# Altium PCB Mosfet_Driver_Circuit.PcbDoc
Units mm, origin at the board's own origin, x right, y up, seen from the top; angles counter-clockwise.
Board outline 99.57 x 123 mm, 2 copper layers (Top Layer, Bottom Layer); 77 components, 37 nets, 241 pads, 61 vias.
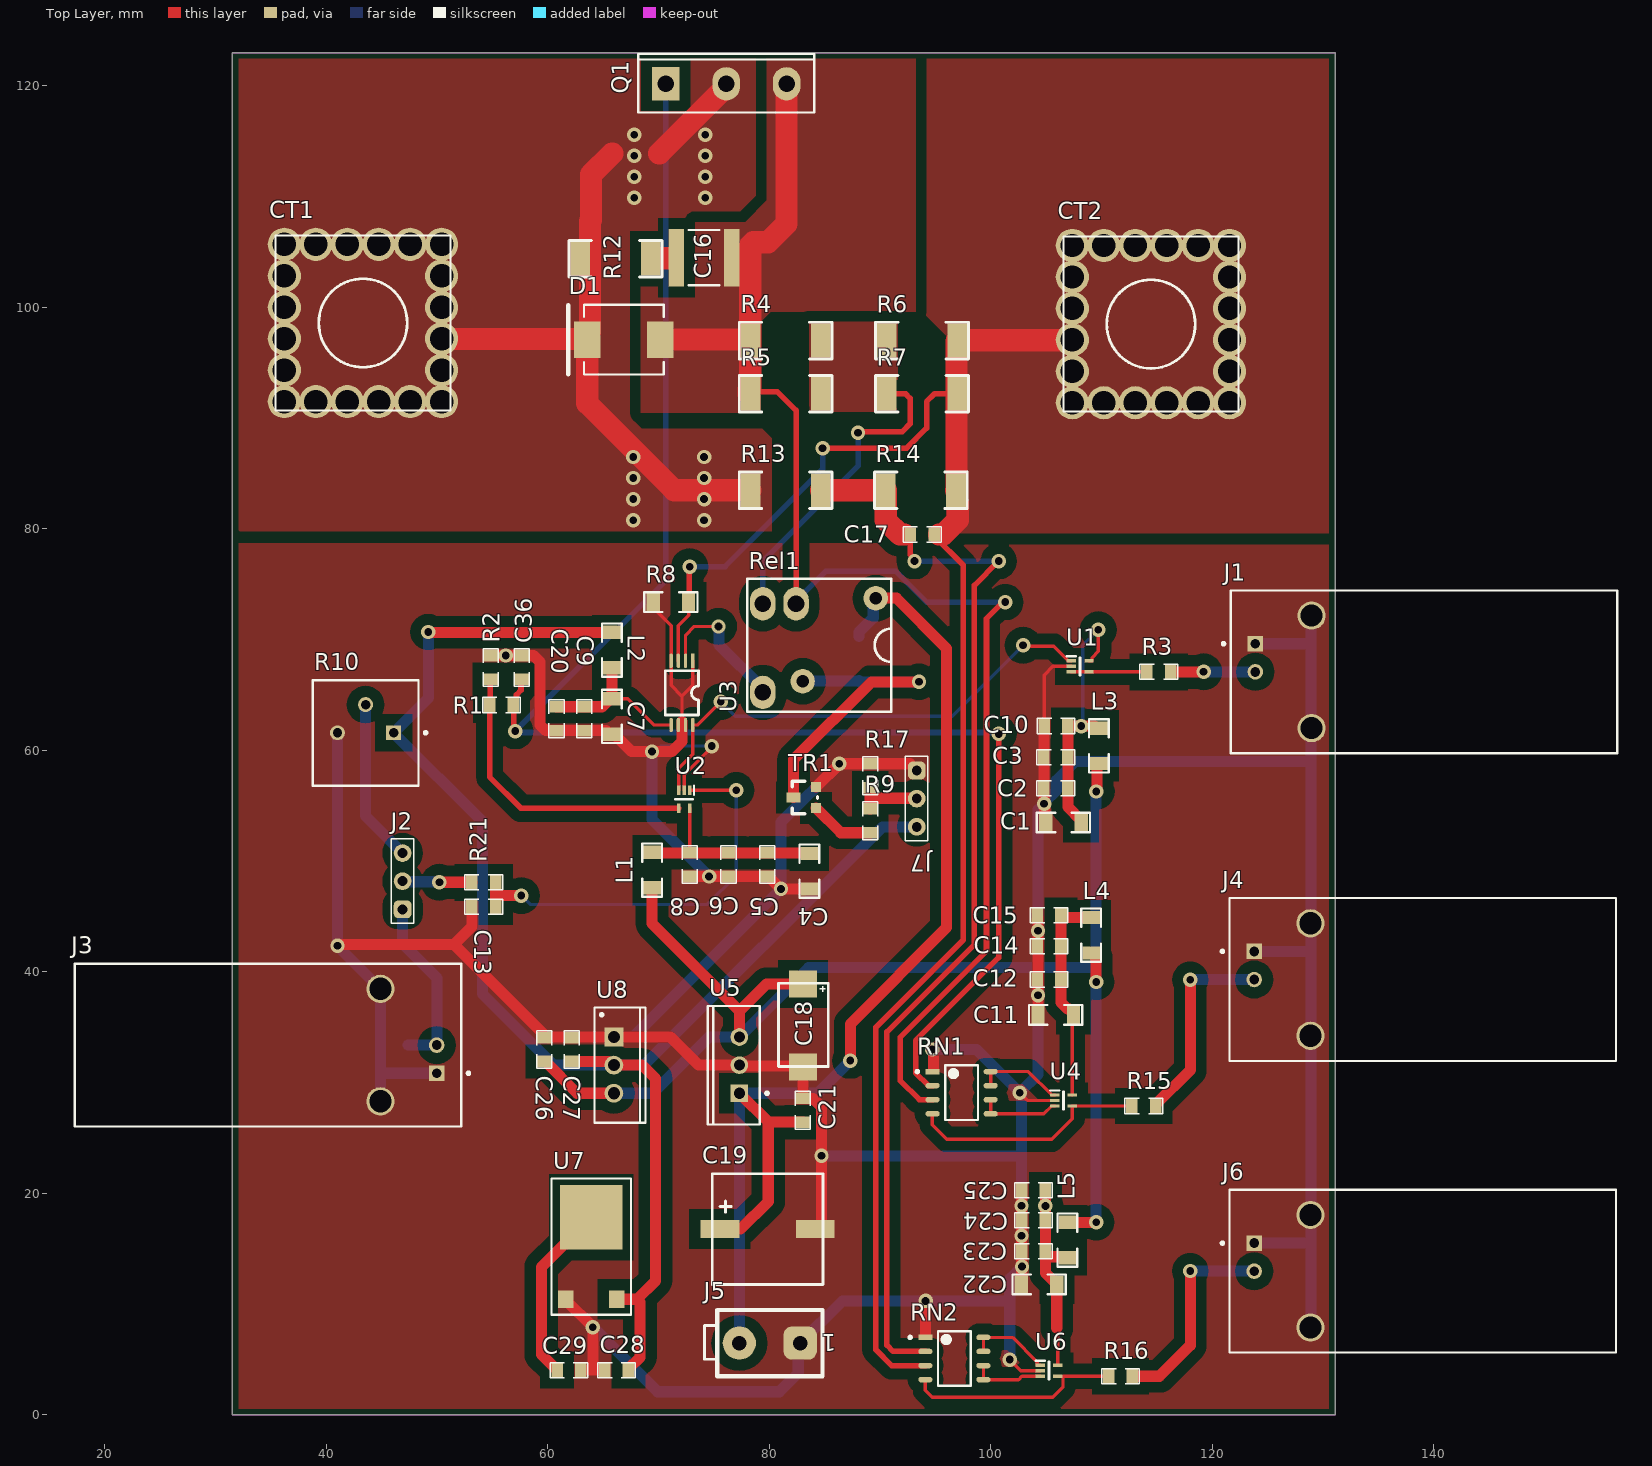
[diagram p0: Top Layer view]
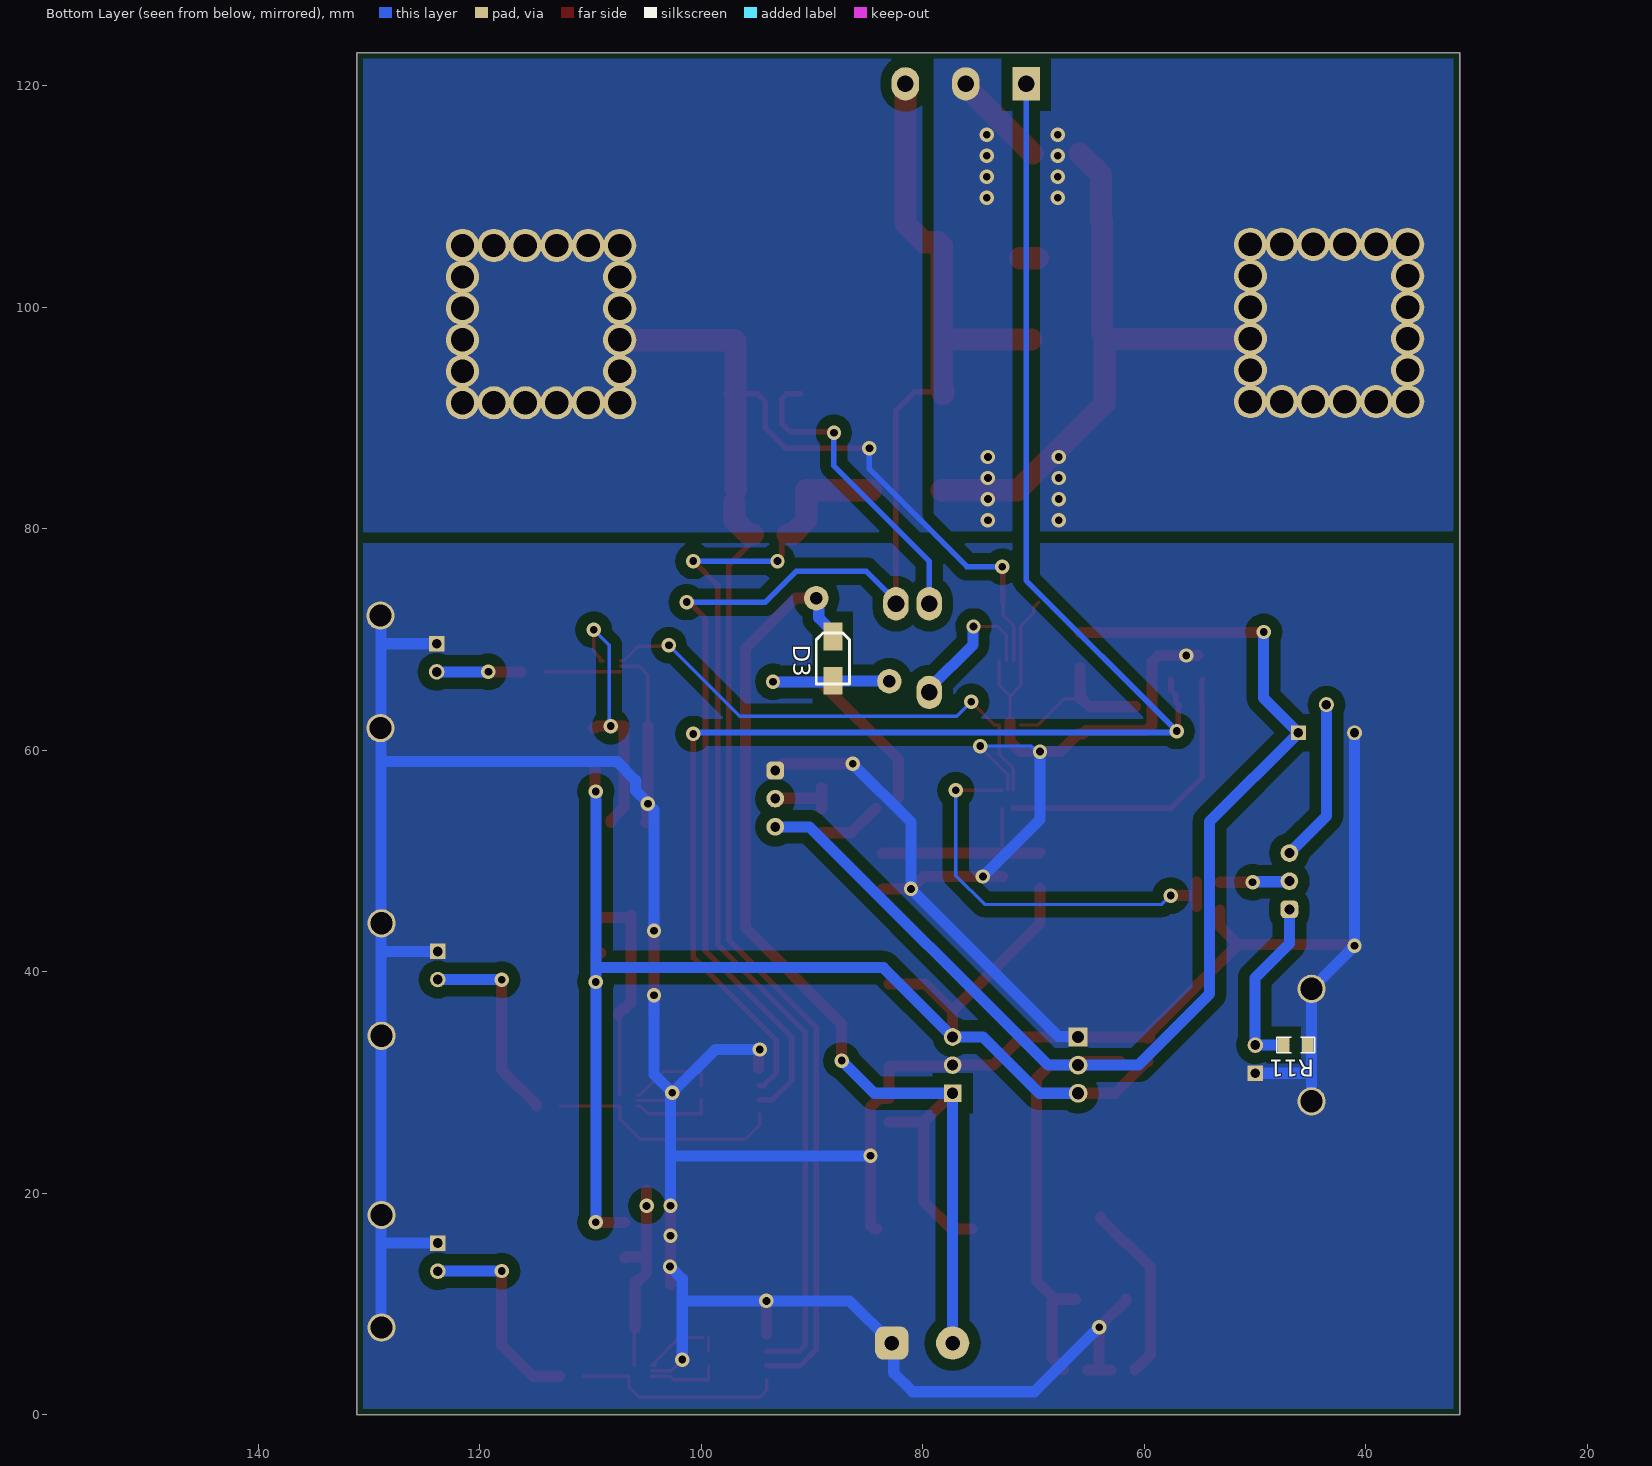
[diagram p1: Bottom Layer view, seen from below]
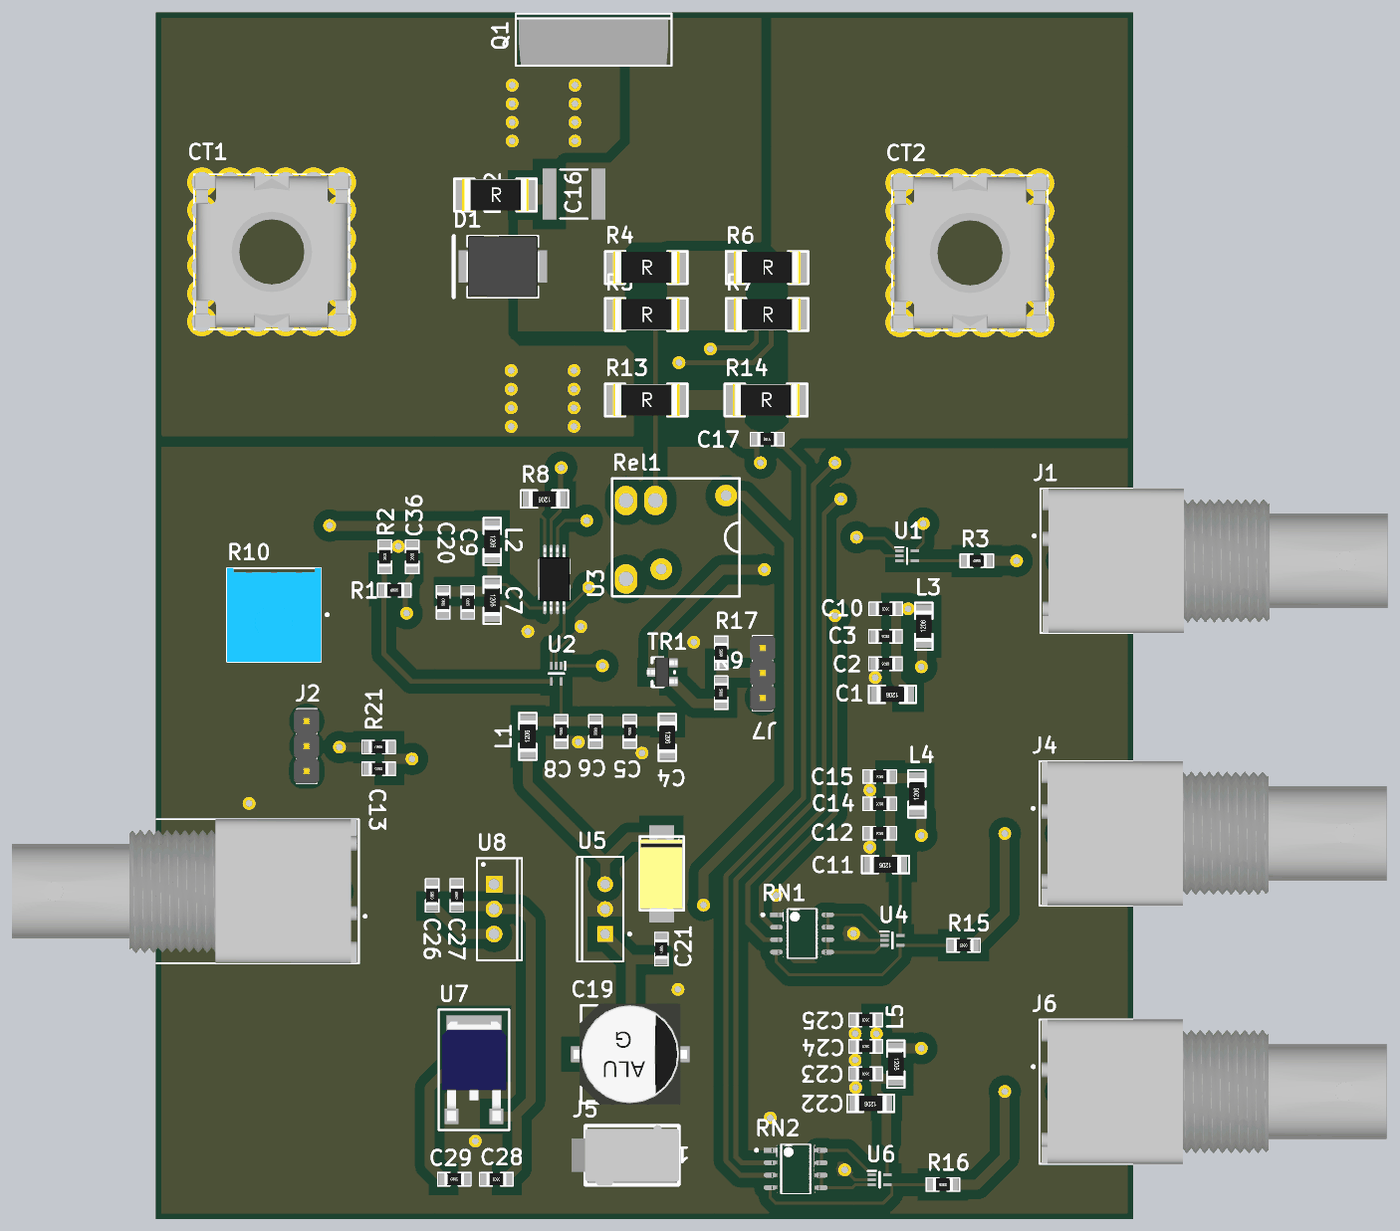
[diagram p2: 3D render of the assembled board from above, using the file's embedded part models]

## Layer stack, top to bottom
Top Solder: solder mask 0.0102, Solder Resist, Dk 3.5
Top Layer: signal copper 0.0356
Dielectric 1: dielectric 0.32, FR-4, Dk 4.8
Bottom Layer: signal copper 0.0356
Bottom Solder: solder mask 0.0102, Solder Resist, Dk 3.5

## Board outline
31.5,0 31.5,123 131.074,123 131.074,0

## Design rules (kind name [scope] priority, off if disabled: settings)
Clearance Keep-Poly [(OnLayer('Keep-Out Layer')) vs (InPoly)] p1: gap=0.5 ignorepadtopadclearanceinfootprint=FALSE
Clearance Polygon [All vs (InPoly)] p2: gap=1 ignorepadtopadclearanceinfootprint=FALSE
Clearance Keepout [All vs (OnLayer('Keep-Out Layer'))] p3: gap=0.5 ignorepadtopadclearanceinfootprint=FALSE
Clearance [All] p4: gap=0.2 ignorepadtopadclearanceinfootprint=FALSE
ComponentClearance [All] p1: gap=0.1 collisioncheckmode=3 verticalgap=0.2 showdistances=FALSE
FabricationTestPointUsage TestPointUsage [All] p1: valid=0 allowmultiple=FALSE
FabricationTestpoint Testpoint [All] p1: side=3 testpointundercomponent=TRUE minsize=1.016 maxsize=2.54 preferedsize=1.524 minholesize=0 maxholesize=1.016 preferedholesize=0.813 testpointgrid=0.025 allowsidetop=TRUE allowsidebottom=TRUE usegrid=TRUE gridtolerance=0
HoleSize [All] p1: absolutevalues=TRUE maxlimit=3.5 minlimit=0 maxpercent=80.000 minpercent=20.000
PlaneClearance [All] p1: clearance=1
PlaneConnect [All] p1: planeconnectstyle=Direct reliefexpansion=0.508 reliefentries=4 reliefconductorwidth=0.254 reliefairgap=0.254
PolygonConnect PolygonConnect_1 [InNet('BAT+')] p1: connectstyle=Direct reliefconductorwidth=0.254 reliefentries=4 polygonreliefangle="90 Angle" airgapwidth=0.254
PolygonConnect [All] p2: connectstyle=Direct reliefconductorwidth=0.8 reliefentries=4 polygonreliefangle="90 Angle" airgapwidth=0.254
RoutingVias [All] p1: holewidth=0.3 width=0.6 viastyle="Through Hole" minholewidth=0.3 minwidth=0.6 maxholewidth=0.8 maxwidth=1.3
SolderMaskExpansion [(IsVia)] p1: expansion=-10 istentingtop=FALSE
Width SGND [InNet('SGND')] p1: maxlimit=2 minlimit=0.3 preferedwidth=0.5 minimp=50.000000 maximp=50.000000 favimp=50.000000
Width PGND [InNet('PGND')] p2: maxlimit=3 minlimit=0.5 preferedwidth=0.5 minimp=50.000000 maximp=50.000000 favimp=50.000000
Width [All] p3: maxlimit=2 minlimit=0.2 preferedwidth=0.2 minimp=50.000000 maximp=50.000000 favimp=50.000000
24 further rules are at their usual default settings.

## Components (designator, comment, footprint, x,y, rotation, side; value= is the part's Value field where it differs from the comment)
C1 "10uF X7R 50V" 1206 106.55,53.5 r180 top
C2 "100nF X7R 100V" 0805 105.85,56.6 r180 top
C3 "1nF X7R 50V" 0805 105.85,59.4 r180 top
C4 "10uF X7R 50V" 1206 83.6,49.1 r270 top
C5 "100nF X7R 100V" 0805 79.798,49.695 r270 top
C6 "1nF X7R 50V" 0805 76.298,49.695 r270 top
C7 "10uF X7R 50V" 1206 65.775,63.073 r270 top
C8 "10pF C0G" 0805 72.798,49.695 r270 top
C9 "100nF X7R 100V" 0805 63.275,62.873 r270 top
C10 "10pF C0G" 0805 105.875,62.204 r180 top
C11 "10uF X7R 50V" 1206 105.85,36.12 r180 top
C12 "100nF X7R 100V" 0805 105.25,39.32 r180 top
C13 "100nF X7R 50V" 0805 54.2,45.9 r0 top
C14 "1nF X7R 50V" 0805 105.25,42.32 r180 top
C15 "10pF C0G" 0805 105.25,45.12 r180 top
C16 "3.3uF X7R 250V" 2220 74.1,104.5 r0 top
C17 "100nF X7R 100V" 0805 93.8,79.5 r0 top
C18 "22uF 25V" TANT_D 83.02,35.17 r90 top
C19 "220uF 50V" C_G55 79.83,16.791 r180 top
C20 "10pF C0G" 0805 60.775,62.873 r270 top
C21 "1uF X7R 25V" 0805 83.02,27.511 r90 top
C22 "10uF X7R 50V" 1206 104.345,11.791 r180 top
C23 "100nF X7R 100V" 0805 103.845,14.791 r180 top
C24 "1nF X7R 50V" 0805 103.845,17.591 r180 top
C25 "10pF C0G" 0805 103.845,20.291 r180 top
C26 "100nF X7R 50V" 0805 59.657,32.99 r90 top
C27 "10uF X5R 10V" 0805 62.157,32.99 r90 top
C28 "100nF X7R 50V" 0805 66.2,4.052 r180 top
C29 "10uF X5R 10V" 0805 61.9,4.052 r0 top
C36 "NM-1nF X7R 50V" 0805 57.629,67.5 r90 top
CT1 "POWERPLUS F-M8" "PowerPlus M8" 43.3,98.6 r0 top
CT2 "POWERPLUS F-M8" "PowerPlus M8" 114.45,98.5 r0 top
D1 "SMCJ15A" LFUS-DO-214AB-2_V 66.85,97.1 r180 top
D3 "STPS140A" SMA 88.1,68.3 r270 bottom
J1 "1-1337543-0" TECO-1-1337543-0_V 128.95,67.1 r270 top
J2 "STRIP-3" SIP-3 46.875,48.2 r90 top
J3 "1-1337543-0" TECO-1-1337543-0_V 44.875,33.4 r90 top
J4 "1-1337543-0" TECO-1-1337543-0_V 128.85,39.32 r270 top
J5 "M_FIT1X2" M_FIT_JR1X2V 80.03,6.491 r90 top
J6 "1-1337543-0" TECO-1-1337543-0_V 128.85,12.98 r270 top
J7 "STRIP-3" SIP-3 93.3,55.65 r270 top
L1 "80R 3A" 1206 69.4,49.2 r90 top
L2 "80R 3A" 1206 65.775,69.073 r270 top
L3 "80R 3A" 1206 109.75,60.42 r90 top
L4 "80R 3A" 1206 109.05,43.32 r90 top
L5 "80R 3A" 1206 106.895,15.791 r270 top
Q1 "IXTK90N25L2" TO-247 76.1,120.2 r0 top
R1 "100R" 0805 55.8,64.1 r0 top
R2 "47K" 0805 54.829,67.5 r90 top
R3 "50R" 0805 115.15,67.1 r180 top
R4 "500 uR" 2512 81.471,97.011 r0 top
R5 "500 uR" 2512 81.471,92.211 r0 top
R6 "500 uR" 2512 93.78,97.011 r0 top
R7 "500 uR" 2512 93.78,92.211 r0 top
R8 "10R" 1206 71.1,73.4 r180 top
R9 "2K7" 0805 89.1,53.65 r90 top
R10 "3386P-1-104LF" BOUR-3386P 43.535,62.87 r180 top
R11 "47K" 0805 46.3,33.4 r0 bottom
R12 "1R5" 2512 66.1,104.4 r0 top
R13 "120K" 2512 81.471,83.5 r0 top
R14 "2K" 2512 93.671,83.5 r0 top
R15 "50R" 0805 113.8,27.9 r180 top
R16 "50R" 0805 111.7,3.5 r180 top
R17 "47K" 0805 89.1,57.725 r90 top
R21 "1K" 0805 54.2,48.1 r0 top
Rel1 "TRS12VDCZ" RELE_TRS 84.5,69.5 r90 top
RN1 "AORN100-1AT5" FP-AORN100-1AT5-IPC_C 97.35,29.105 r0 top value=1/100kΩ
RN2 "AORN100-1AT5" FP-AORN100-1AT5-IPC_C 96.7,5.1 r0 top value=1/100kΩ
TR1 "MMBT2222ALT1G" SOT-23 83.2,55.75 r0 top
U1 "NCS20071" SOT-553-5 108.05,67.6 r0 top
U2 "NCS20071" SOT-553-5 72.3,55.6 r270 top
U3 "INA240" TSSOP-8 72.1,65.2 r270 top
U4 "NCS20071" SOT-553-5 106.55,28.4 r0 top
U5 "LM2940CT-9.0/NOPB" NDE0003A 77.28,31.59 r90 top
U6 "NCS20071" SOT-553-5 105.25,4 r0 top
U7 "LD1117DT33" TO-252-7805 63.915,14.152 r90 top
U8 "LD1117V50" TO220 65.957,31.59 r270 top

## Footprints (in the part's own frame and the unit in brackets; to place one, negate y for a bottom-side part, rotate by r counter-clockwise, add the part's x,y. Pads: shape width x height; smd on the part's side, far side on the other; paste and mask are expansions set on the pad)
0805 [mm]
  rect 1.05x1.3 smd: 1(-1.075,0) 2(1.075,0)
  silkscreen extent -1.7,-0.69 1.7,0.69, body extent -1,-0.62 1,0.63, height 0.5
1206 [mm]
  rect 1.2x1.6 smd: 1(-1.6,0) 2(1.6,0)
  silkscreen extent -2.4,-0.89 2.4,0.89, body extent -1.6,-0.8 1.6,0.8, height 0.6
2220 [mm] "Chip Capacitor, Body 5.7x5.0mm, IPC High Density"
  rect 1.4x5.2 smd: 1(-2.5,0) 2(2.5,0)
  silkscreen extent -1.4,-2.5 1.4,2.5, body extent -2.95,-2.63 2.95,2.63, height 1.4
2512 [mil]
  rect 70x120 smd: 1(-125,0) 2(125,0)
  silkscreen extent -165,-65 165,65, body extent -134,-65 134,65, height 25
BOUR-3386P [mm] "THD, 3-Leads, Body 9.53x9.53mm, Pitch 2.54mm"
  rect 1.35x1.35 hole 0.85: 1(-2.54,1.27)
  round 1.35 hole 0.85: 2(0,-1.27) 3(2.54,1.27)
  silkscreen extent -5.54,-3.48 4.76,6.05, body extent -4.79,-3.52 4.79,6.06, height 4.95
C_G55 [mm]
  rect 3.5x1.6 smd: 1(4.3,0) 2(-4.3,0)
  silkscreen extent -5,-5 5,5, body extent -5.8,-5.15 5.8,5.15, height 10.2
FP-AORN100-1AT5-IPC_C [mm]
  rect 1.269x0.499 smd paste+0 mask+0: 1(-2.62,1.905)
  rrect100% 1.269x0.499 smd paste+0 mask+0: 2(-2.62,0.635) 3(-2.62,-0.635) 4(-2.62,-1.905) 5(2.62,-1.905) 6(2.62,-0.635) 7(2.62,0.635) 8(2.62,1.905)
  silkscreen extent -4.12,-2.46 1.49,2.46, body extent -3.35,-2.57 3.35,2.57, height 0.25
LFUS-DO-214AB-2_V [mm] "Molded Diode, 2-Leads, Body 7.11x6.22mm"
  rect 2.4x3.3 smd: 1(-3.3,0) 2(3.3,0)
  silkscreen extent -3.6,-3.15 5,3.15, body extent -3.77,-3.11 3.77,3.11, height 2.62
M_FIT_JR1X2V [mm]
  rrect50% 3x3 hole 1.3: 1(0,-2.75)
  round 3 hole 1.3: 2(0,2.75)
  silkscreen extent -3,-4.75 3,5.89, body extent -3.1,-4.8 3.1,6.2, height 12.8
NDE0003A [mm] "FM, 3-Leads, Body 10.7x4.7mm, Pitch 2.54mm"
  rect 1.6x1.6 hole 1: 1(-2.54,0)
  round 1.6 hole 1: 2(0,0) 3(2.54,0)
  silkscreen extent -5.35,-2.63 5.35,2.85, body extent -5.4,-1.9 5.4,2.9, height 19.4
"PowerPlus M8" [mm] "PowerPlus con vite M8"
  round 3 hole 2.1: 1(-7.1,-7.1) 1(-7.1,-4.26) 1(-7.1,-1.42) 1(-7.1,1.42) 1(-7.1,4.26) 1(-7.1,7.1) 1(-4.26,-7.1) 1(-4.26,7.1) 1(-1.42,-7.1) 1(-1.42,7.1) 1(1.42,-7.1) 1(1.42,7.1) 1(4.26,-7.1) 1(4.26,7.1) 1(7.1,-7.1) 1(7.1,-7.1) 1(7.1,-4.26) 1(7.1,-1.42) 1(7.1,1.42) 1(7.1,4.26) 1(7.1,7.1)
  silkscreen extent -7.9,-7.9 7.9,7.9, body extent -7.9,-7.7 7.92,7.7, height 12
RELE_TRS [mm] "Relay TRS Tianbo / Tyco"
  round 2.2 hole 1.1: 1(-3.25,1.5) 2(4.25,-5.1)
  oval 3x2.3 hole 1.5: 3(3.75,5.1) 4(-4.25,5.1) 5(3.75,2.1)
  silkscreen extent -6,-6.5 6,6.5, body extent -6.13,-6.63 6.13,6.63, height 9.8
SIP-3 [mm]
  rrect50% 1.6x1.6 hole 0.9: 1(-2.54,0)
  round 1.6 hole 0.9: 2(0,0) 3(2.54,0)
  silkscreen extent -3.81,-1.02 3.81,1.02, body extent -3.81,-1.24 3.81,1.3, height 10.1
SMA [mm]
  rect 2.5x1.7 smd: A(2,0) K(-2,0)
  silkscreen extent -2.3,-1.5 2.3,1.5, body extent -2.6,-1.3 2.6,1.3, height 2.4
SOT-23 [mil]
  rect 36x36 smd: 1(40,-37.5) 2(40,37.5)
  rect 50x36 smd: 3(-40,0)
  silkscreen extent -45,-58 45,58, body extent -66,-59 58,59, height 39
SOT-553-5 [mm]
  rect 0.85x0.3 smd: 1(-0.8,0.5) 2(-0.8,0) 3(-0.8,-0.5) 4(0.8,-0.5) 5(0.8,0.5)
  silkscreen extent -1.22,-0.8 0.03,0.9
TANT_D [mm]
  rect 2.413x2.54 smd: 1(3.75,0) 2(-3.75,0)
  silkscreen extent -3.69,-2.29 3.81,2.21, body extent -3.65,-2.15 3.65,2.15, height 2.81
TECO-1-1337543-0_V [mm] "SMD, 2-Leads, Body 34.9x14.7mm, Pitch 2.54mm"
  rect 1.4x1.4 hole 0.89: 1(-2.54,-5.08)
  round 1.4 hole 0.89: 2(0,-5.08)
  round 2.55 hole 2.01: MH1(-5.08,0) MH2(5.08,0)
  silkscreen extent -7.35,-8.07 7.35,27.6, body extent -7.35,-7.1 7.35,28.05, height 15.8
TO220 [mm] "TO, Thru-Hole, Vertical, Heatsink Mounted; 3 In-Line Leads; Pitch 2.54 mm"
  rect 1.7x1.7 hole 1.1: 1(-2.54,0)
  round 1.7 hole 1.1: 2(0,0) 3(2.54,0)
  silkscreen extent -5.2,-1.75 5.2,2.85, body extent -5.25,-1.8 5.25,2.9, height 19.7
TO-247 [mm] "SIP with Mounting Hole; 3 Leads; Body 20 x 15.6 x 5 mm (typ); Pitch 5.45 mm"
  rect 2.5x3 hole 1.5: 1(-5.45,0)
  oval 2.5x3 hole 1.5: 2(0,0) 3(5.45,0)
  silkscreen extent -7.95,-2.6 7.95,2.7, body extent -7.62,-2.5 7.62,2.07, height 23.83
TO-252-7805 [mm]
  rect 1.6x1.4 smd: 1(-3.7,2.285) 3(-3.7,-2.285)
  rect 5.8x5.6 smd: 2(3.7,0.005)
  silkscreen extent -5.1,-3.58 7.2,3.58, body extent -4.15,-3.3 5.95,3.3, height 2.4
TSSOP-8 [mm]
  rect 1.3x0.3 smd: 1(-2.9,0.975)
  oval 1.3x0.3 smd: 2(-2.9,0.325) 3(-2.9,-0.325) 4(-2.9,-0.975) 5(2.9,-0.975) 6(2.9,-0.325) 7(2.9,0.325) 8(2.9,0.975)
  silkscreen extent -2,-1.5 2,1.5, body extent -3.2,-1.55 3.2,1.55, height 1.08

## Part data
C1 C4 C7 C11 C22: library part "CAP_10uF X7R 50V_1206", "Capacità", 1 Supplier Part Number=CL31B106KBHNNNE, ArSilicii Part Number=CPC0232011, 1 Supplier="ARROW ELECTRONICS ITALIA S.R.L.", ComponentLink1Description="Datasheet for 10uF X7R 25V", Manufacturer Part Number=CL31B106KBHNNNE, SMD/TH=SMD
C2 C5 C9 C12 C17 C23: library part "CAP_100nF X7R 100V_0805", "Capacità", 1 Supplier Part Number=CL21B104KCFSFNG, 2 Supplier Part Number=1907331, ArSilicii Part Number=CPC0213101, Manufacturer=SAMSUNG, 1 Supplier="ARROW ELECTRONICS ITALIA S.R.L.", 2 Supplier="FARNELL ITALIA S.R.L.", Manufacturer Part Number=CL21B104KCFSFNG, SMD/TH=SMD
C3 C6 C14 C24 C36: library part "CAP_1nF X7R 50V_0805", "Capacità", 1 Supplier Part Number=B37941K5102K60, 2 Supplier Part Number=0805B102K5CT, ArSilicii Part Number=CPC0213001, Manufacturer="EPCOS / TDK", 1 Supplier="DISTAR S.R.L.", 1 Supplier Unit Price=0,00235, 2 Supplier="ARROW ELECTRONICS ITALIA S.R.L.", Manufacturer Part Number=B37941K5102K60, SMD/TH=SMD
C8 C10 C15 C20 C25: library part "CAP_10pF C0G_0805", "Capacità", ArSilicii Part Number=CPC0614010, 1 Supplier Unit Price=0,09, SMD/TH=SMD
C13 C26 C28: library part "CAP_100nF X7R 50V_0805", "Capacità", 1 Supplier Part Number=C0805C104K5RAC7800, 2 Supplier Part Number="08055C104KAT2A AVX", ArSilicii Part Number=CPC0213100, Manufacturer=Kemet, 1 Supplier="ARROW ELECTRONICS ITALIA S.R.L.", 1 Supplier Unit Price=0,00240, 2 Supplier="AVNET EMG ITALY S.R.L.", Manufacturer Part Number=C0805C104K5RAC7800, SMD/TH=SMD
C16: library part "CAP_1uF X7R 250V_2220", "Capacità", 1 Supplier Part Number=2435506, 2 Supplier Part Number=810-CGA9N3X7R2E105K, Manufacturer=TDK, Manufacturer Part Number=CGA9N3X7R2E105K230KA, 1 Supplier="FARNELL ITALIA S.R.L.", 1 Supplier Unit Price=0,606, 2 Supplier=MOUSER, 2 Supplier Unit Price=0,594, SMD/TH=SMD
C18: library part "CAP_TANT_22uF 25V Case D", "Capacità polarizzata", 1 Supplier Part Number=KETT491D226K025AT, ArSilicii Part Number=CPC0352022, Manufacturer=Kemet, Manufacturer Part Number=T491D226K025AT, 1 Supplier="DISTAR S.R.L.", 1 Supplier Unit Price=0,060, 2 Supplier="ABACUS ECC S.R.L. - UNIPERSONALE", 2 Supplier Part Number=KETT491D226K025AT, 3 Supplier="ARROW ELECTRONICS ITALIA S.R.L.", 3 Supplier Part Number=KETT491D226K025AT, SMD/TH=SMD
C19: library part "CAP_EL_220uF 50V", "Capacità polarizzata", 2 Supplier Part Number=5194346, ArSilicii Part Number=CPC0402221, Manufacturer=Nichicon, Manufacturer Part Number=UPS1H221MPD, 1 Supplier="ARROW ELECTRONICS ITALIA S.R.L.", 1 Supplier Unit Price=0,04516, 2 Supplier="RS COMPONENTS S.P.A.", ComponentLink1Description="Datasheet for 220uF 50V", ComponentLink1URL=http://docs-europe.electrocomponents.com/webdocs/0649/0900766b8064973a.pdf, SMD/TH=TH
C21: library part "CAP_1uF X7R 25V_0805", "Capacità", 1 Supplier Part Number=CL21B105KAFNNNG, ArSilicii Part Number=CPC0212002, Manufacturer=Samsung, 1 Supplier="AVNET EMG ITALY S.R.L.", Manufacturer Part Number=CL21B105KAFNNNG, SMD/TH=SMD
C27 C29: library part "CAP_10uF X5R 10V_0805", "Capacità", 1 Supplier Part Number=CL21A106KPFNNNE, ArSilicii Part Number=CPC0212010, Manufacturer=Samsung, 1 Supplier="ARROW ELECTRONICS ITALIA S.R.L.", HelpURL=\\Sorp\articoli\CPC0212010\F3102_CerPerChar.pdf, Manufacturer Part Number=CL21A106KPFNNNE, SMD/TH=SMD
CT1 CT2: library part "PAD_POWERPLUS F-M8", "Singolo contatto", 1 Supplier Part Number=S98978, ArSilicii Part Number=QC04000180, Manufacturer=WURTH, Manufacturer Part Number=93517, 1 Supplier="Würth Elektronik ICS GmbH & Co. KG", SMD/TH=TH
D1: library part CMP-2000-07102-1, "Transient Voltage Suppression Diode, 15 V, -65 to 150 degC, 2-Pin DO-214AB (SMCJ), RoHS, Tape and Reel", Breakdown Voltage-Max=18.5V, Breakdown Voltage-Min=16.7V, Clamping Voltage-Max=24.4V, Manufacturer=Littelfuse, Package Description="2-Pin Surface Mount Device, Body 6.855 x 5.905 mm", Package Reference=DO-214AB, Power Dissipation=1500W, Datasheet URL=http://www.littelfuse.com/products/tvs-diodes/surface-mount/~/media/electronics/datasheets/tvs_diodes/littelfuse_tvs_diode_smcj_datasheet.pdf.pdf, Datasheet Version=11/2015, Directional=Uni-Directional, Manufacturer URL=http://www.littelfuse.com/, Mounting Technology=SurfaceMount
D3: library part "DIODE SCHOTTKY_STPS140A", "Diodo Schottky", 1 Supplier Part Number=STMSTPS140A, ArSilicii Part Number=CPDS117000, Manufacturer=STMicroelectronics, 1 Supplier="ARROW ELECTRONICS ITALIA S.R.L.", 1 Supplier Unit Price=0,0600, ComponentLink1Description="Datasheet for STPS140A", ComponentLink1URL=http://www.st.com/web/en/resource/technical/document/datasheet/CD00001107.pdf, Manufacturer Part Number=STPS140A, SMD/TH=SMD
J1 J3 J4 J6: library part CMP-2000-05853-1, "Female Connector, Pitch 2.54 mm, 1 x 2 Position, Height 15.8 mm, Tail Length 3.8 mm,  / -55 to 85 degC, RoHS, Bulk", Frequency Max=4GHz, Manufacturer="TE Connectivity", Package Description="Female Connector, Pitch 2.54 mm, 1 x 2 Position, Height 15.8 mm, Tail Length 3.8 mm", Coaxial Cable Types=-, Coaxial Termination=Solder, Connector Body Style=RightAngleJack, Connector Mounting=PCBMount, Connector Type=BNCCoaxial, Contact Material=Brass, Contact Plating=GoldPlatedContacts, Datasheet URL=http://www.te.com/commerce/DocumentDelivery/DDEController?Action=showdoc&DocId=Customer+Drawing%7F1337543%7FG%7Fpdf%7FEnglish%7FENG_CD_1337543_G.pdf%7F1-1337543-0, Datasheet Version="Rev. G, 12/2012", Impedance=50ohm, Manufacturer URL=http://www.te.com/, Mounting Technology=ThroughHole, Package Reference=1-1337543-0, Product Range=-, SVHC=ToBeAdvised
J2 J7: library part "HEADER 3", SMD/TH=TH
J5: "Mini Fit Junior 2 poli", ArSilicii Part Number=QA02006000, Manufacturer=Molex, Manufacturer Part Number=39-28-1023, 1 Supplier="ABACUS ECC S.R.L. - UNIPERSONALE", 1 Supplier Unit Price=0,07900, 2 Supplier="HT COMPONENTI ELETTRONICI S.R.L.", ComponentLink1Description="Datasheet for M_FIT1X2", ComponentLink1URL=http://www.molex.com/webdocs/datasheets/pdf/en-us/0039281023_PCB_HEADERS.pdf, SMD/TH=TH
L1 L2 L3 L4 L5: library part "Ferrite 80R 3A", "Ferrite", 1 Supplier Part Number=3275550P, ArSilicii Part Number=CPF0006000, Manufacturer="Wurth Elektronik", Manufacturer Part Number=74279215, Supplier Part Number 1=732-1629-1-ND, 1 Supplier="RS COMPONENTS S.P.A.", 1 Supplier Unit Price=0,21000, ComponentLink1Description="Datasheet for Ferrite 80R 3A", ComponentLink1URL=http://docs-europe.electrocomponents.com/webdocs/0033/0900766b80033a26.pdf, SMD/TH=SMD, Supplier 1=Digi-Key
Q1: "MOS CANALE N-250V-90A Linear", 1 Supplier Part Number=PB90N06S4-04, 2 Supplier Part Number=826-9042P, ArSilicii Part Number=CPTP200080, Manufacturer Part Number=IPB90N06S404ATMA2, 1 Supplier="EBV ELEKTRONIK S.R.L.", 1 Supplier Unit Price=0,56, 2 Supplier="RS COMPONENTS S.R.L.", SMD/TH=SMD
R1 R2 R3 R4 R5 R6 R7 R8 R9 R11 R12 R13 R14 R15 R16 R17 R21: library part RES_SMD, "Resistenza", SMD/TH=SMD
R10: library part CMP-2000-05592-1, "Square Trimpot(R) Trimming Potentiometer, 100 KOhm, +/- 10%, 0.5 W, -55 to 125 degC, 3-Pin THD, RoHS, Tube", Manufacturer=Bourns, Manufacturer Series=3386, Maximum Operating Temperature=125C, Minimum Operating Temperature=-55C, Operating Temperature-Max (Cel)=125, Operating Temperature-Min (Cel)=-55, Package=RectangularPackage, Package Description="3-Pin Through Hole Device, Body 9.53 x 9.53 mm, Pitch 2.54 mm", Package Reference=3386P, Power Rating=1/2W, Rated Power Dissipation (P) (W)=0.5, Rated Temperature (Cel)=85, Resistance (ohm)=100000, Resistance Law=Linear, Resistance Value=100KOhm, Resistive Element Material=Cermet, Temperature Coefficient=100ppm/C, Tolerance=10%, Tolerance (%)=10, Actuator Orientation=Vertical, Actuator Type=Screw, Datasheet URL=http://www.bourns.com/docs/Product-Datasheets/3386.pdf, Datasheet Version=05/2016, Family=3386, Lead Free=NO, Manufacturer URL=http://www.bourns.com/, Mounting=ThroughHole, Mounting Feature=ThroughHole, Mounting Technology=ThroughHole, Number of Terminals=3, Number of Turns=1, Packaging=Tube, Product Depth=9.53mm, Product Height=4.83mm, Product Length=9.53mm, Product Type=Potentiometer, Shaft Diameter=3.15mm, Technology=Cermet, Terminal Finish=TINLEAD, Terminal Shape=WIRE, Termination Style=Pin, Type=Trimmer
Rel1: library part RELE'_TRS12VDCZ, "Relay", 2 Supplier Part Number="FRS3M C-S DC12V", 3 Supplier Part Number=R504D/012Z1F, ArSilicii Part Number=CR00015100, Manufacturer=Tianbo, 1 Supplier="DISTAR S.R.L.", 1 Supplier Part Number=TRS12VDCZ, 1 Supplier Unit Price=0,337, 2 Supplier="STEALTH COMPONENTS, INC.", 3 Supplier="FITRE S.P.A.", ComponentLink1Description="Datasheet for TRS12VDCZ", ComponentLink1URL=http://www.spbnek.ru/mycontent/firm/tianbo/trs.pdf, Manufacturer Part Number=TRS12VDCZ, SMD/TH=TH
RN1 RN2: library part CMP-02406-000003-1, "RES NETWORK 4 RES MULT OHM 8SOIC", Manufacturer=Vishay, Number Of Resistors=4, Power Per Resistor=100mW, Power Rating=400mW, Resistance=1/100kΩ, Temperature="-55°C to +155°C", Temperature Coefficient=25ppm/°C, Temperature Range High=+155°C, Temperature Range Low=-55°C, Tolerance=0.1%, Automotive=Yes, Automotive Grade="Grade 0", Category=Res, ComponentLink2Description=Datasheet, ComponentLink2URL=https://www.vishay.com/docs/60127/aorn.pdf, Composition="Thin Film", Device Class L1="Passive Components", Device Class L2=Resistors, Device Class L3="Resistor Arrays", Digikey Description="RES NETWORK 4 RES MULT OHM 8SOIC", Height=1.73mm, Ipc Land Pattern Name=SOIC127P607X173-8, Lead Free=Yes, Manufacturer Part Number=AORN100-1AT5, Octopart=https://octopart.com/aorn1001at5-vishay-54384707, Package=AORN100-1AT5, RoHS=TRUE, Series=AORN, Standoff Height=0.1524mm, Termination=Gull-Wing
TR1: library part NPN_MMBT2222ALT1G, "NPN Transistor", 1 Supplier Part Number=SCGMMBT2222ALT1G, 2 Supplier Part Number=1459098, ArSilicii Part Number=CPTS001000, Manufacturer="ON SEMICONDUCTOR", 1 Supplier="ARROW ELECTRONICS ITALIA S.R.L.", 1 Supplier Unit Price=0,00777, 2 Supplier=Farnell, 2 Supplier Unit Price=0,085, ComponentLink1Description="Datasheet for MMBT2222ALT1G", ComponentLink1URL=http://www.onsemi.com/pub_link/Collateral/MMBT2222LT1-D.PDF, HelpURL="D:\Documenti ArSilicii\DataSheet\Transistor\MMBT2222LT1-D.pdf", Manufacturer Part Number=MMBT2222ALT1G, SMD/TH=SMD, Supplier 1=Farnell, Supplier Part Number 1=1459098
U1 U2 U4 U6: "Rail-to-Rail Input/Output, 3 MHz Op Amps", 1 Supplier Part Number=MCP6021-E/SN-ND, Manufacturer="Microchip Technology", Manufacturer Part Number=MCP6021-E/SN, 1 Supplier=DigiKey, 1 Supplier Unit Price=1,22, ComponentLink1Description="Datasheet for MCP6021", ComponentLink1URL=http://ww1.microchip.com/downloads/en/DeviceDoc/21685d.pdf, SMD/TH=SMD
U3: "Current sense amplifier", SMD/TH=SMD
U5: library part CMP-0062-02531-3, "1A Low Dropout Regulator, 3-pin TO-220, Pb-Free", Manufacturer="Texas Instruments", PackageTopMarking="NSUZXYTTE#*LM2940CT*-9.0 P+", PowerWise=N, ComponentLink1Description="Datasheet URL", ComponentLink1URL=http://www.ti.com/general/docs/lit/getliterature.tsp?genericPartNumber=LM2940C&fileType=pdf, CompType="LDO IC", PackageDescription="TO-220, Molded, 3 Lead, Straight", PackageReference=NDE0003A, PinCount=3, RoHS=Y
U7: "Regolatore Low Dropout", 1 Supplier Part Number="LD1117DT33TR TO252-3", ArSilicii Part Number=IC01000010, Manufacturer=ST, 1 Supplier="HT COMPONENTI ELETTRONICI S.R.L.", 1 Supplier Unit Price=0,105, 2 Supplier="EBV ELEKTRONIK S.R.L.", ComponentLink1Description="Datasheet for LD1117DT33", ComponentLink1URL=http://www.st.com/st-web-ui/static/active/en/resource/technical/document/datasheet/CD00000544.pdf, HelpURL="D:\Documenti ArSilicii\DataSheet\Regolatori\LD1117.pdf", Manufacturer Part Number=LD1117DT33, SMD/TH=SMD
U8: library part CMP-0244-00472-1, "Fixed Low Drop Positive Voltage Regulator, 5V, 3-Pin TO-220", ComponentLink1Description="Manufacturer URL", ComponentLink1URL=http://www.st.com, ComponentLink2Description=Datasheet, ComponentLink2URL=http://www.st.com/internet/com/TECHNICAL_RESOURCES/TECHNICAL_LITERATURE/DATASHEET/CD00000544.pdf, ComponentLink3Description="Package Specification", ComponentLink3URL=http://www.st.com/internet/com/TECHNICAL_RESOURCES/TECHNICAL_LITERATURE/PACKAGE_INFORMATION/CD00004649.pdf, DatasheetVersion=1/11/2011, PackageDescription="TO, Thru-Hole, Vertical, Heatsink Mounted; 3 In-Line Leads; Pitch 2.54 mm", PackageReference=TO220, PackageVersion=ver3.0

## Via types
v1: diameter 1.3, hole 0.7, Top Layer to Bottom Layer, 61 vias

## Nets (pads, with @x,y where several pads share a name; then routed paths per layer and width w, separated by ;. In a path a pad name is that pad's centre, name@x,y a point inside that pad or via, vN(x,y) a via of type N, cw(c..) or ccw(c..) an arc to the next point about the centre after c; other vN are vias at no path point)
+3V3: C29.1 U7.2 | length 16.4
  Top Layer w1: C29.1 60.825,4.177 60.8,4.202 60.675,4.202 59.4,5.476 59.4,13.342 61.51,15.452 61.61,15.452 63.91,17.752 U7.2
+5V0: C27.1 C28.1 J7.3 L2.1 R10.1 U7.3 U8.2 | length 142.3
  Top Layer w1: v1(49.2,70.7) 49.227,70.673 L2.1 ; C27.1 65.442,31.915 65.767,31.59 U8.2 68.51,31.59 69.7,30.4 69.7,12.1 68.052,10.452 ; U7.3 68.052,10.452 ; C28.1 67.275,4.177 68.3,5.202 68.3,10.203 68.052,10.452
  Bottom Layer w1: v1(49.2,70.7) 49.2,64.725 R10.1 54.1,53.575 54.1,38 60.51,31.59 68.69,31.59 90.21,53.11 J7.3
+9V0: C18.1 C26.1 L1.1 L3.1 L4.1 L5.1 U5.3 U8.3 | length 126.3
  Top Layer w1: C26.1 59.782,31.915 62.647,29.05 U8.3 ; L1.1 69.4,44.36 77.28,36.48 ; U5.3 77.28,36.48 ; C18.1 79.72,38.92 77.28,36.48 ; L5.1 109.491,17.391 v1(109.5,17.4) ; L4.1 109.25,41.72 109.35,41.62 109.35,41.42 109.5,41.27 v1(109.5,39.1) ; v1(109.5,56.3) 109.557,56.357 109.557,58.72 109.657,58.82 L3.1
  Bottom Layer w1: U8.3 69.45,29.05 74.53,34.13 U5.3 83.55,40.4 109.5,40.4 ; v1(109.5,17.4) v1(109.5,39.1) 109.5,40.4 ; v1(109.5,56.3) 109.5,40.4
+12V0: C19.1 C21.1 D3.K J5.2 Rel1.2 U5.1 | length 106.3
  Top Layer w1: C19.1 75.539,16.8 77.4,16.8 79.893,19.293 79.893,26.436 ; U5.1 79.893,26.436 ; C21.1 79.893,26.436 ; v1(87.3,32) 87.3,35.3 96,44 96,69.2 91.45,73.75 Rel1.2
  Bottom Layer w1: J5.2 U5.1 84.35,29.05 v1(87.3,32) ; D3.K 88.1,70.7 89.37,71.97 89.37,73.52 Rel1.2
C_1: Rel1.4 U3.2 | length 13.5
  Top Layer w0.3: U3.2 72.425,70.425 73.2,71.2 v1(75.4,71.2) v1@75.688,71.2
  Bottom Layer w1: v1(75.4,71.2) 75.457,71.143 75.457,69.543 79.4,65.6 Rel1.4
GND: C1.2 C2.2 C3.2 C4.2 C5.2 C6.2 C7.2 C8.2 C9.2 C10.2 C11.2 C12.2 C13.1 C14.2 C15.2 C18.2 C19.2 C20.2 C21.2 C22.2 C23.2 C24.2 C25.2 C26.2 C27.2 C28.2 C29.2 C36.2 J1.1 J1.MH1 J1.MH2 J3.1 J3.MH1 J3.MH2 J4.1 J4.MH1 J4.MH2 J5.1 J6.1 J6.MH1 J6.MH2 J7.1 R2.2 R8.2 R10.3 R11.1 R17.2 RN1.1 RN2.1 TR1.2 U1.2 U2.2 U3.1 U3.4 U3.6 U3.7 U4.2 U5.2 U6.2 U7.1 U8.1 | length 502.5
  Top Layer w0.3: C13.1@53.125,45.6 C13.1 ; R8.2 69.95,72.95 69.95,72.45 71.125,71.275 U3.4 71.125,65.875 72.1,64.9 ; 72.1,62.6 72.1,64.9 ; U2.2 72.3,57.8 74.8,60.3 v1(74.8,60.4) ; U3.1 73.075,65.875 72.1,64.9 ; v1(101.7,5) 102.7,4 U6.2 ; v1(102.6,29.1) 103.3,28.4 U4.2 ; C10.2 104.8,66.8 105.6,67.6 U1.2
  Top Layer w0.5: R2.2 R2.2@55.2,68.575
  Top Layer w1: v1(40.995,42.36) 41.135,42.5 51.5,42.5 ; C13.1@53.125,45.6 53.125,44.125 51.5,42.5 ; R2.2@55.2,68.575 v1(56.2,68.575) C36.2 58.695,68.575 59.281,67.989 59.281,62.305 59.786,61.8 60.648,61.8 60.65,61.798 C20.2 C9.2 65.25,61.798 65.575,61.473 C7.2 65.975,61.473 67.548,59.9 v1(69.4,59.9) 71.2,59.9 72.1,60.8 72.1,62.6 ; U7.1 61.63,10.352 v1(64.05,7.932) 64.05,4.052 ; C29.2 64.05,4.052 ; C28.2 64.05,4.052 ; C8.2 v1(74.548,48.62) C6.2 C5.2 79.923,48.62 v1(81.043,47.5) C4.2 ; C19.2 84.4,16.791 84.7,17.091 v1(84.7,23.4) 84.7,27.8 83.939,28.561 83.045,28.561 C21.2 C18.2 82.934,31.505 77.365,31.505 U5.2 73.61,31.59 71.07,34.13 U8.1 62.157,34.13 59.847,34.13 59.782,34.065 59.532,34.065 59.507,34.09 59.507,34.493 51.5,42.5 ; TR1.2 v1(86.314,58.8) R17.2 92.69,58.8 J7.1 ; 94.08,7.3 94.08,10.18 94.1,10.2 v1(94.1,10.3) ; v1(94.7,33) 94.7,32.919 94.8,32.819 94.8,31.3 ; C22.2 102.757,11.803 v1(102.757,16.191) v1(102.757,18.891) 102.757,20.278 C25.2 ; C15.2 104.175,44.995 104.25,44.92 v1(104.25,43.72) v1(104.25,37.9) C11.2 ; C10.2 v1(104.8,55.2) 104.857,55.143 104.857,53.593 C1.2
  Bottom Layer w0.3: v1(69.4,59.9) 69.671,59.9 70.171,60.4 v1(74.8,60.4)
  Bottom Layer w1: R10.3 v1(40.995,42.36) J3.MH2 44.875,30.8 ; J3.MH1 44.875,30.8 ; J3.1 44.935,30.86 44.875,30.8 ; v1(64.05,7.932) 69.881,2.1 80.9,2.1 82.6,3.8 82.6,6.311 J5.1 86.589,10.3 v1(94.1,10.3) 101.4,10.3 101.7,10 ; U8.1 66.004,34.177 67.721,34.177 v1(81.043,47.5) 81.043,53.53 v1(86.314,58.8) ; v1(69.4,59.9) 69.4,53.768 v1(74.548,48.62) ; v1(84.7,23.4) 102.657,23.4 102.757,23.5 ; v1(94.7,33) 98.7,33 v1(102.6,29.1) ; v1(101.7,5) 101.7,10 ; v1(102.757,18.891) 102.757,23.5 ; v1(102.8,13.4) 101.7,12.3 101.7,10 ; v1(104.25,37.9) 104.25,30.75 v1(102.6,29.1) ; v1(104.25,43.72) 104.25,54.65 v1(104.8,55.2) 104.8,55.281 105.9,56.381 105.9,57.3 107.6,59 128.9,59 ; J6.1 128.62,15.52 128.9,15.8 ; J4.1 128.54,41.86 128.9,41.5 ; J1.1 128.86,69.64 128.9,69.6 ; J6.MH2 128.9,7.95 128.9,15.8 ; J1.MH1 128.9,72.13 128.9,69.6 ; v1(102.6,29.1) 102.6,29.019 102.757,28.861 102.757,23.5 ; 128.9,15.8 128.9,41.5 ; 128.9,41.5 128.9,59 ; 128.9,59 128.9,69.6
Nc_1: R4.2 R5.2 R6.1 R7.1 Rel1.3 | length 28.2
  Top Layer w0.5: v1(88,88.7) 88.1,88.8 92,88.8 92.7,89.5 92.7,91.8 92.289,92.211 R7.1@91,92.211
  Bottom Layer w0.5: Rel1.3 79.4,77.1 88,85.7 v1(88,88.7)
NetC1_1: C1.1 C2.1 C3.1 C10.1 L3.2 U1.5 | length 24.7
  Top Layer w0.3: U1.5 109.125,68.1 109.125,68.375 109.7,68.95 v1(109.7,70.9)
  Top Layer w1: C1.1 108.15,53.7 106.95,54.9 C10.1 v1(108.158,62.204) 109.366,62.204 109.55,62.02 L3.2
  Bottom Layer w0.3: v1(108.158,62.204) 108.3,62.346 108.3,69.5 v1(109.7,70.9)
NetC4_1: C4.1 C5.1 C6.1 C8.1 L1.2 U2.5 | length 18.3
  Top Layer w0.3: C8.1 72.8,50.771 U2.5
  Top Layer w1: L1.2 69.45,50.75 83.55,50.75 C4.1
NetC7_1: C7.1 C9.1 C20.1 L2.2 U3.5 | length 14.5
  Top Layer w0.3: C7.1 67.227,64.673 69.6,62.3 U3.5
  Top Layer w1: C20.1 C9.1 64.889,63.948 65.475,64.533 65.475,64.573 65.575,64.673 C7.1@65.675,64.673 ; C7.1 C7.1@65.675,64.673 ; L2.2 65.775,64.773 C7.1@65.675,64.673
NetC11_1: C11.1 C12.1 C14.1 C15.1 L4.2 U4.5 | length 19.6
  Top Layer w0.3: U4.5 107.35,36.02 C11.1
  Top Layer w1: C15.1 C15.1@106.325,44.995 ; C11.1 107.45,36.32 107.111,36.659 106.911,36.659 106.325,37.245 C12.1 C14.1 C15.1@106.325,44.995 ; L4.2 106.4,44.92 C15.1@106.325,44.995
NetC13_2: C13.2 R21.2 U2.1 | length 37.3
  Top Layer w0.3: U2.1 v1(77,56.4)
  Top Layer w1: C13.2 55.275,47 ; R21.2 55.275,47 ; v1(57.6,46.9) 55.375,46.9 55.275,47
  Bottom Layer w0.3: v1(57.6,46.9) 58.4,46.1 74.4,46.1 77,48.7 v1(77,56.4)
NetC16_1: C16.1 R12.2 | length 1.6
  Top Layer w2: R12.2@69.6,104.45 C16.1@71.2,104.45
NetC22_1: C22.1 C23.1 C24.1 C25.1 L5.2 U6.5 | length 18.5
  Top Layer w0.3: 106,7.8 106.025,7.775 106.025,4.5 U6.5
  Top Layer w1: C25.1 v1(104.92,18.878) C24.1 C23.1 C23.1@104.92,14.666 ; 105.945,7.855 C22.1 105.945,11.991 105.845,12.091 105.645,12.091 104.92,12.816 C23.1@104.92,14.666 ; L5.2 106.795,14.291 105.295,14.291 C23.1@104.92,14.666
  Bottom Layer w1: v1@104.895,18.903 v1(104.92,18.878)
NetCT1_1: CT1.1 D1.2 Q1.2 R12.1 R13.1 | length 63.5
  Top Layer w2: CT1.1@50.4,97.18 50.44,97.14 63.51,97.14 D1.2 ; 65.8,113.9 63.9,112 63.9,107.889 63.795,107.785 63.795,97.795 63.55,97.55 D1.2 ; 70.05,113.9 76.1,119.95 Q1.2 ; R13.1 71.4,83.5 63.55,91.35 D1.2
  other v1: 67.7,80.8 74.1,80.8 67.7,82.7 74.1,82.7 67.7,84.6 74.1,84.6 67.7,86.5 74.1,86.5 67.8,109.9 74.2,109.9 67.8,111.8 74.2,111.8 67.8,113.7 74.2,113.7 67.8,115.6 74.2,115.6
NetD3_A: D3.A Rel1.1 TR1.3 | length 28.2
  Top Layer w1: TR1.3 82.184,59.184 89.2,66.2 v1(93.5,66.2)
  Bottom Layer w1: Rel1.1 83.025,66.275 88.075,66.275 D3.A 88.2,66.2 v1(93.5,66.2)
NetJ1_2: J1.2 R3.1 | length 7.6
  Top Layer w1: R3.1 v1(119.2,67.1)
  Bottom Layer w1: v1(119.2,67.1) J1.2
NetJ2_1: J2.1 J3.2 R11.2 | length 16.1
  Bottom Layer w1: J2.1 46.875,42.566 50,39.441 J3.2@50,33.4 ; R11.2 J3.2
NetJ2_2: J2.2 R21.1 | length 6.3
  Top Layer w1: v1(50.2,48.1) R21.1
  Bottom Layer w1: J2.2 46.925,48.15 50.15,48.15 v1(50.2,48.1)
NetJ2_3: J2.3 R10.2 | length 14.8
  Bottom Layer w1: R10.2 43.535,54.08 J2.3
NetJ4_2: J4.2 R15.1 | length 18.5
  Top Layer w1: R15.1 114.875,28.025 118,31.15 v1(118,39.3) v1@117.99,39.31 ; J4.2@123.75,39.3 J4.2
  Bottom Layer w1: v1(118,39.3) 118.01,39.31 123.76,39.31 J4.2
NetJ6_2: J6.2 R16.1 | length 18.9
  Top Layer w1: R16.1 115.2,3.5 118,6.3 118,12.9 117.95,12.95 v1(118,13)
  Bottom Layer w1: v1(118,13) 123.75,13 J6.2
NetJ7_2: J7.2 R9.2 R17.1 | length 6.1
  Top Layer w1: R9.2 89.1,55.688 ; R17.1 89.1,55.688 ; J7.2 93.262,55.688 89.1,55.688
NetR1_1: R1.1 R2.1 U2.4 | length 27.1
  Top Layer w0.5: R2.1@54.704,66.425 54.777,66.352 54.777,64.152 R1.1 54.725,57.619 57.544,54.8 U2.4
NetR3_2: R3.2 U1.3 U1.4 | length 6.8
  Top Layer w0.3: U1.3 U1.4 R3.2
NetR9_1: R9.1 TR1.1 | length 5.8
  Top Layer w1: TR1.1 86.438,52.575 R9.1
NetR15_2: R15.2 RN1.4 U4.4 | length 21.5
  Top Layer w0.3: RN1.4 94.7,27.17 94.7,26.2 96,24.9 105.5,24.9 107.35,26.75 U4.4 R15.2
NetR16_2: R16.2 RN2.4 U6.4 | length 19.1
  Top Layer w0.3: RN2.4 94.08,2.22 94.7,1.6 105.6,1.6 106.5,2.5 106.5,3.5 R16.2
NetRN1_5: RN1.5 RN1.6 U4.3 | length 7.3
  Top Layer w0.3: RN1.6 RN1.5 104.775,27.2 105.475,27.9 U4.3
NetRN1_7: RN1.7 RN1.8 U4.1 | length 7.9
  Top Layer w0.3: RN1.7 RN1.8 103.365,31.01 105.475,28.9 U4.1
NetRN2_5: RN2.5 RN2.6 U6.3 | length 6.5
  Top Layer w0.3: RN2.6 RN2.5 102.495,3.195 102.8,3.5 U6.3
NetRN2_7: RN2.7 RN2.8 U6.1 | length 7.1
  Top Layer w0.3: RN2.7 RN2.8 ; RN2.8@99.815,7 101.95,7 104.175,4.775 104.175,4.5 U6.1
No_1: C16.2 D1.1 Q1.3 R4.1 R5.1 Rel1.5 RN1.3 | length 132.9
  Top Layer w0.5: R5.1@78.125,92.406 80.694,92.406 82.4,90.7 Rel1.5 ; RN1.3 93.53,28.47 91.8,30.2 91.8,34.1 99.6,41.9 99.6,71.9 101.1,73.4 v1(101.3,73.4)
  Top Layer w2: D1.1 R4.1@78.125,97.1 ; R5.1@78.125,92.2 78.125,92.406 78.125,92.613 78.27,92.758 78.27,97.1 78.27,105.585 78.57,105.885 79.87,105.885 81.55,107.564 Q1.3
  Bottom Layer w0.5: Rel1.5 82.4,73.5 85.1,76.2 91.4,76.2 94.2,73.4 v1(101.3,73.4)
Out_Current: U1.1 U2.3 U3.8 | length 45.2
  Top Layer w0.3: U2.3 71.8,58.4 73.075,59.675 U3.8 73.5,62.3 v1(75.6,64.4) ; v1(102.9,69.5) 103,69.4 105.675,69.4 106.975,68.1 U1.1
  Bottom Layer w0.3: v1(75.6,64.4) 76.9,63.1 96.5,63.1 v1(102.9,69.5)
Power_N: C17.2 CT2.1 R6.2 R7.2 R8.1 R14.2 RN2.3 U3.3 | length 152.8
  Top Layer w0.3: U3.3 71.775,71.275 72.7,72.2 R8.1
  Top Layer w0.5: R8.1 72.75,73.45 72.75,76.55 v1(72.8,76.6) ; v1(84.8,87.3) 92.4,87.3 94.2,89.1 94.2,91.5 94.911,92.211 96.9,92.211 R7.2 ; RN2.3 91.035,4.465 89.6,5.9 89.6,35 97.5,42.9 97.5,76.75 94.875,79.375 C17.2
  Top Layer w2: C17.2@95.3,79.5 95.7,79.5 97,80.8 R14.2@97,82.357 ; R14.2 96.9,83.555 R7.2@96.9,92.211 ; R7.2 96.9,92.266 96.9,96.956 96.99,97.045 CT2.1@107.315,97.045
  Bottom Layer w0.5: v1(72.8,76.6) 76,76.6 84.8,85.4 v1(84.8,87.3)
Power_P: C17.1 R13.2 R14.1 RN2.2 | length 99
  Top Layer w0.5: C17.1 92.725,77.691 93.1,77.316 v1(93.1,77.1) ; RN2.2 91.165,5.735 90.6,6.3 90.6,34.6 98.5,42.5 98.5,74.9 v1(100.7,77.1)
  Top Layer w2: R13.2 R14.1@89.8,83.5 ; R14.1 90.496,80.797 91.792,79.5 C17.1@92.2,79.5
  Bottom Layer w0.5: v1(93.1,77.1) v1(100.7,77.1)
VG: C36.1 Q1.1 R1.2 RN1.2 | length 148.6
  Top Layer w0.5: R1.2@56.775,64 56.912,63.862 56.912,61.888 v1(57.05,61.75) ; R1.2 57.15,64.375 57.15,65.025 57.568,65.443 57.568,66.363 C36.1 ; RN1.2 94.346,29.74 93.2,30.886 93.2,33.8 100.7,41.3 v1(100.7,61.5)
  Bottom Layer w0.5: Q1.1 70.65,75.35 v1(57.05,61.75) 57.175,61.625 100.575,61.625 v1(100.7,61.5)

## Polygon pours and split planes (outlines as drawn)
Power_N on Bottom Layer "NONET_L-01_P-001" (solid, pour order 9): 131.074,123 131.074,79.7 79.301,79.7 79.299,123
NetCT1_1 on Bottom Layer "NONET_L-01_P-001" (solid, pour order 8): 31.5,123 79,123 79,79.802 31.5,79.8
GND on Bottom Layer "NONET_L-01_P-001" (solid, pour order 7): 131,78.7 131,0.074 131.074,0 31.5,0 31.5,78.7 31.6,78.7
no net on Bottom Layer "NONET_L-01_P-001" (solid, pour order 1): 87.2,97.8
NetCT1_1 on Top Layer "NONET_L-01_P-001" (solid, pour order 4): 31.5,123 79.3,123 79.3,109.9 77.5,108.1 74.6,108.1 67.8,101.3 67.8,89.711 68.481,89.03 79.363,89.03 80.203,88.19 80.203,79.803 31.5,79.8
No_1 on Top Layer "NONET_L-01_P-001" (solid, pour order 3): 80.2,123 93.2,123 93.2,99.6 80.1,99.6 79.2,98.7 79.2,90.5 68.4,90.5 68.4,104.9 71.2,107.7 77.8,107.7 79.766,109.666 79.766,123
GND on Top Layer "NONET_L-01_P-001" (solid, pour order 6): 131,78.7 131,0.074 131.074,0 31.5,0 31.5,78.7 31.6,78.7
Power_N on Top Layer "NONET_L-01_P-001" (solid, pour order 5): 93.4,122.897 93.4,99.989 95.991,97.397 95.991,79.597 131.391,79.597 131.366,79.623 131.366,122.897
Nc_1 on Top Layer "NONET_L-01_P-001" (solid, pour order 0): 83.6,98.7 91.6,98.7 91.6,90.6 83.6,90.6

## Keep-outs
Keep-Out Layer:
  the board outline again, w0.1

## Text inside footprints (layer, text, board x,y; h text height)
J5: Top Overlay "1" at 86.03,7.29 h1.5 r180